# Altium PCB Odin_0.pcbdoc (part 2 of 3)
Units mil, origin at the board's own origin, x right, y up, seen from the top; angles counter-clockwise.
Board outline 3937 x 3937 mil, 4 copper layers (Top Layer, mSIG, mPWR, Bottom Layer), stack 62.3 mil thick; 149 components, 218 nets, 830 pads, 480 vias.
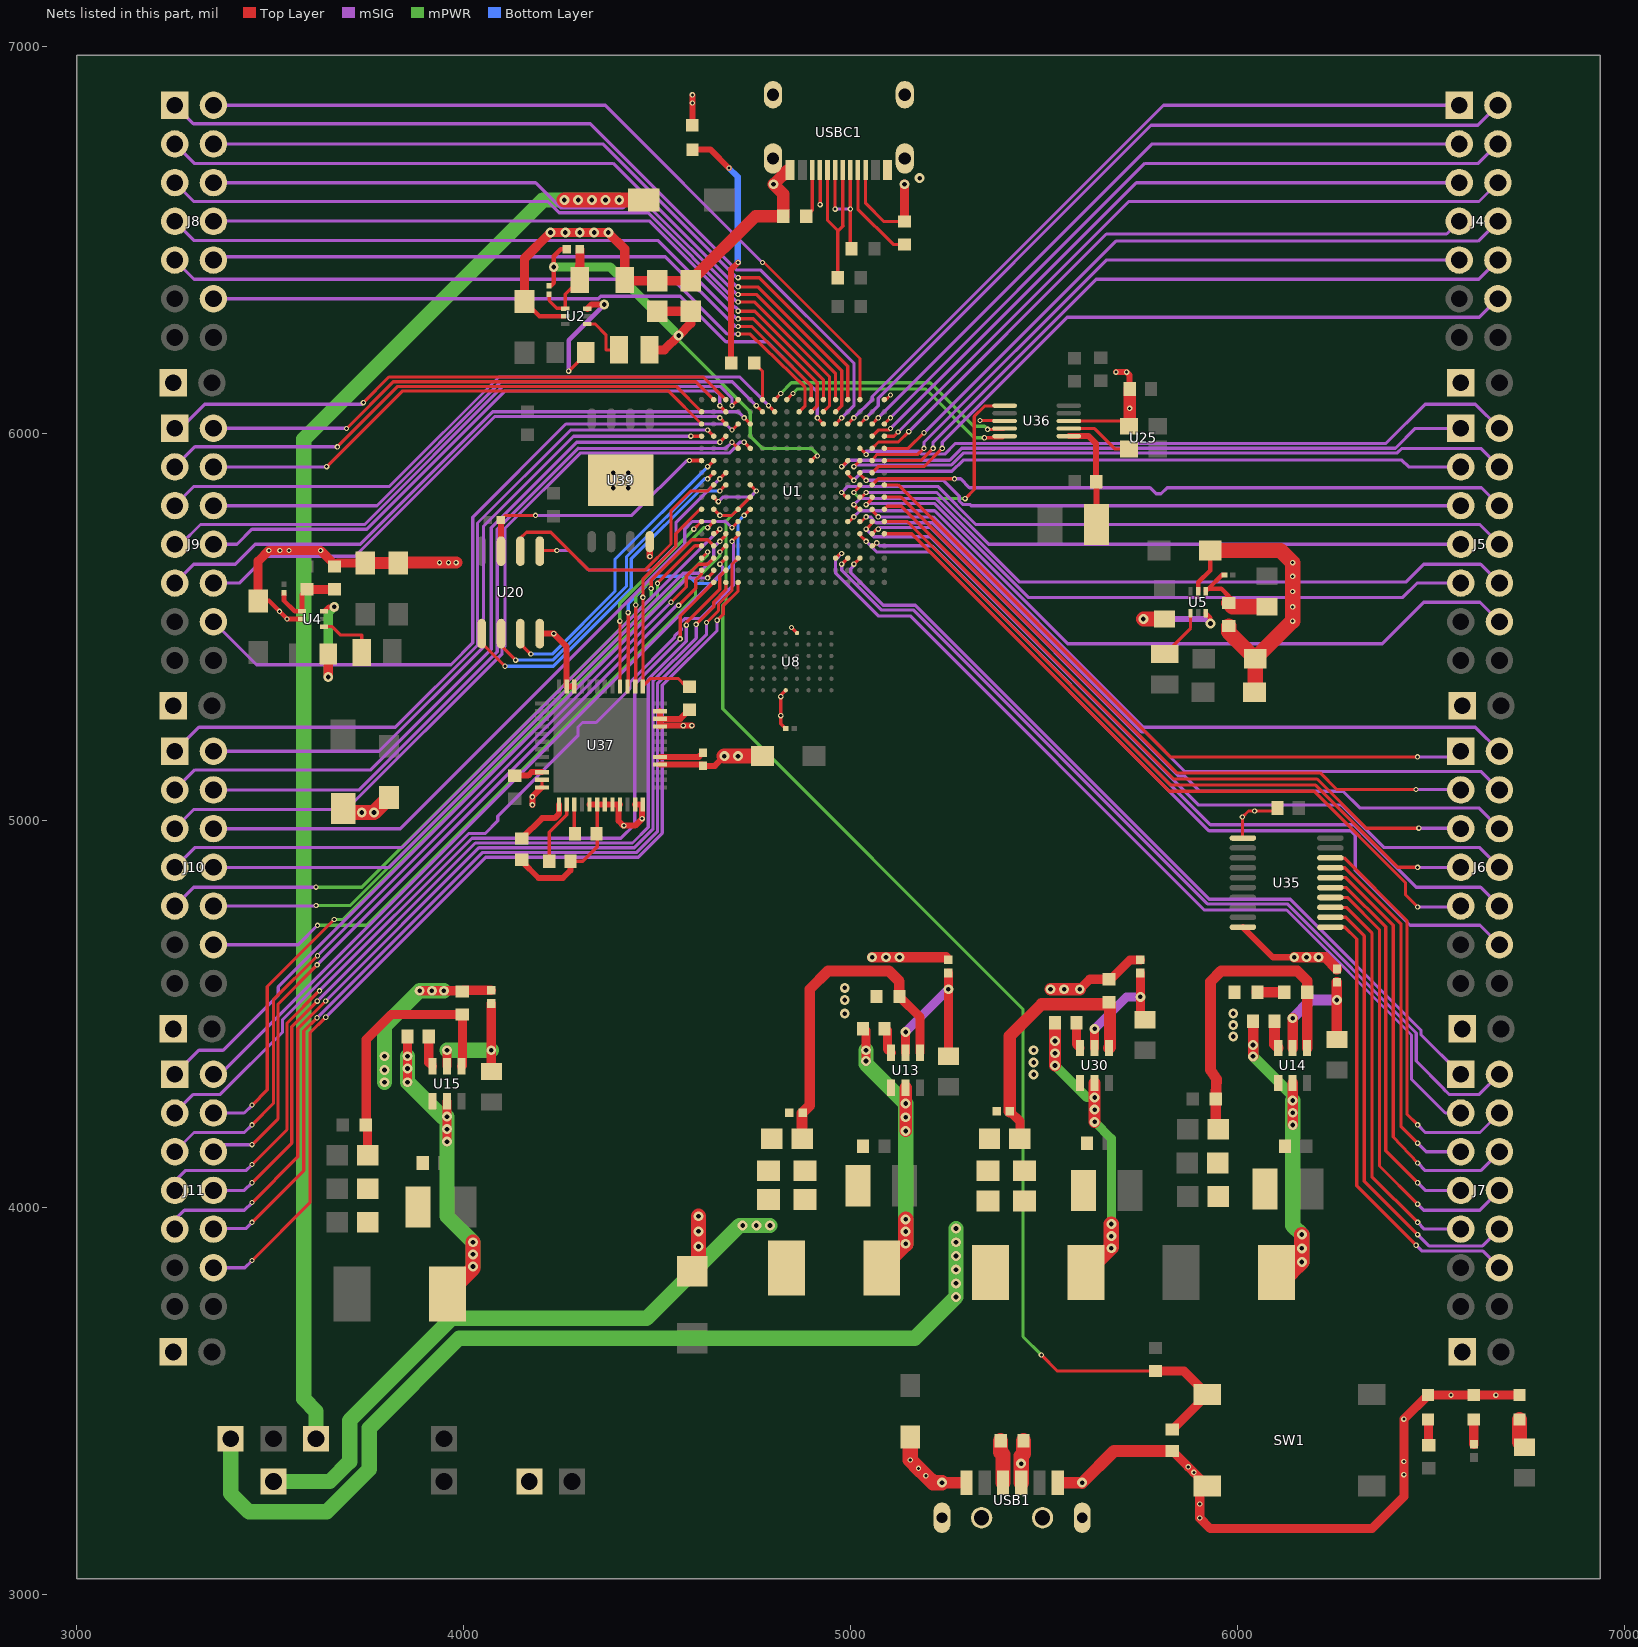
[diagram p4: the nets of this part, all layers, seen from the top]

## Via types
v1: diameter 13.8, hole 7.9, Top Layer to Bottom Layer, 291 vias
v2: diameter 25.6, hole 12.2, Top Layer to Bottom Layer, 176 vias
v3: diameter 24, hole 12, Top Layer to Bottom Layer, 13 vias

## Nets (pads, with @x,y where several pads share a name; then routed paths per layer and width w, separated by ;. In a path a pad name is that pad's centre, name@x,y a point inside that pad or via, vN(x,y) a via of type N, cw(c..) or ccw(c..) an arc to the next point about the centre after c; other vN are vias at no path point)
9VTO5V: C44.1 C45.1 C63.1 L8.1 P10.1 R47.1 | length 2504.7
  mPWR w39.4: P10.1@3397.6,3403 3397.6,3261.3 3444.9,3214 3645.6,3214 3755.9,3324.3 3755.9,3430.6 3988.1,3662.8 5165.4,3662.8 5271.7,3769 v2(5271.7,3804.5) v2(5271.7,3839.9) 5271.6,3875.4 5271.6,3910.8 v2(5271.6,3946.2)
  other v2: 5271.7,3769.1 5271.7,3875.4 5271.7,3910.8
24VTO5V: C25.1 C26.1 C27.1 L5.1 P4.1 R14.1 | length 1619.5
  mPWR w39.4: P4.1@3507.9,3292.7 3653.5,3292.7 3705,3343.8 3705,3449.8 3968.5,3714 4471.7,3714 4712.2,3954.2 v2(4755.9,3954.2) v2(4791.3,3954.2)
  other v2: 4720.5,3954.2
$2N3: C10.1 R1.1 R2.2 U2.1 | length 236.1
  Top Layer w8.3: C10.1@4220.5,6360.7 4220.5,6343.9 4240.2,6324.2 4260.8,6324.2 U2.1@4262.2,6322.8 4262.2,6360.4 R2.2@4299.4,6397.6
  Top Layer w23.6: R2.2@4299.4,6397.6 R1.1@4299.8,6476.3
$2N6: L1.1 U2.4 | length 132.7
  Top Layer w8.3: U2.4@4319.1,6283.4 4339.9,6283.4 4367.2,6256.1 4367.2,6216.5 L1.1@4400.9,6216.5
$2N15: C58.1 R40.2 R110.1 U5.1 | length 250.2
  Top Layer w11.8: U5.1@5917.3,5592.8 5924.3,5599.8 ; C58.1@5965.6,5635.3 5959.7,5635.3 5924.3,5599.8 ; R40.2@5976.4,5562.5 5976.4,5580.1 5956.7,5599.8 5924.3,5599.8
  Top Layer w39.4: R40.2@5976.4,5562.5 5986.3,5552.6 R110.1@6078.7,5552.6
$2N16: L12.1 U5.4 | length 133.1
  Top Layer w8.3: L12.1@5811,5430.5 5877.9,5497.5 U5.4@5877.9,5535.9
$2N19: R7.2 U2.6 | length 325.5
  Top Layer w9.8: v1(4270.9,6161.4) 4315,6205.4 R7.2@4315,6210.1
  Top Layer w15.7: U2.6@4319.1,6322.8 4329.8,6333.5 v2(4362.9,6333.5)
  mSIG w11.8: v1(4270.9,6161.4) 4270.9,6241.6 v2(4362.9,6333.5)
$2N21: R43.2 U5.6 | length 264.7
  Top Layer w11.8: U5.6@5917.3,5535.9 5929.1,5524.1 v2(5929.1,5509.3)
  Top Layer w39.4: v2(5755.9,5521.1) R43.2@5811,5521.1
  mSIG w15.7: v2(5755.9,5521.1) 5917.3,5521.1 v2(5929.1,5509.3)
$2N28: C12.1 R5.1 R6.2 U4.1 | length 211.5
  Top Layer w11.8: C12.1@3535.4,5589 3535.4,5568.3 3563,5540.8 U4.1@3581.8,5540.8 3581.8,5585 R5.1@3594.5,5597.7
  Top Layer w23.6: R5.1@3594.5,5597.7 R6.2@3665.4,5597.7
$2N29: R42.2 U4.6 | length 278.2
  Top Layer w11.8: U4.6@3638.7,5540.8 3650.5,5552.6 v2@3665.4,5552.6
  Top Layer w23.6: v2(3649.6,5371.5) R42.2@3649.6,5430.5
  mPWR w23.6: v2(3649.6,5371.5) 3649.6,5536.8 v2@3665.4,5552.6
  other v2: 3665.3,5552.6
$2N31: L3.1 U4.4 | length 151.9
  Top Layer w8.3: U4.4@3638.7,5501.4 3659.5,5501.4 3680.9,5480 3736.2,5480 L3.1@3736.2,5434.5
$4N4: R11.2 USBC1.A6 USBC1.B6 | length 453
  Top Layer w8.3: USBC1.B6@4939.7,6681 4939.7,6551.1 4967.1,6523.6 ; R11.2@4966.4,6403 4966.4,6522.9 4980.3,6536.8 4979,6538.1 USBC1.A6@4979,6681
$4N5: R8.1 USBC1.B5 | length 125.6
  Top Layer w8.3: R8.1@4884.7,6561.9 4900.3,6577.5 USBC1.B5@4900.3,6681
$4N6: R9.1 USBC1.A5 | length 259.1
  Top Layer w8.3: USBC1.A5@5018.4,6681 5018.4,6579.6 5109.1,6488.9 R9.1@5138.5,6488.9
$4N16: R23.2 USBC1.A7 USBC1.B7 | length 344.7
  Top Layer w8.3: v1(4959.4,6580.1) USBC1.A7@4959.4,6681 ; USBC1.B7@4998.7,6681 v1(4998.7,6580.4) 4998.7,6480.9 R23.2@5001.8,6477.8
  mSIG w8.3: v1@4959.4,6580.2 v1(4998.7,6580.4)
$4N1335: R98.2 USB1.A5 | length 110.7
  Top Layer w39.4: R98.2@5387,3397.6 5387,3368.2 5393,3362.2 USB1.A5@5393,3289.4
$4N1352: LED3.2 R34.1 | length 64.5
  Top Layer w23.6: LED3.2@6609.7,3452.8 6609.7,3389.1 R34.1@6610.2,3388.5
$4N3061: LED4.2 R99.1 | length 635.8
  Top Layer w15.7: LED4.2@4590.7,6733.7 4637.8,6733.7 v1(4685,6686.4) ; R99.1@4690.8,6182.5 4690.8,6248.8 4690,6249.6 4690,6410.7 4690.8,6411.5 4690.8,6424.5 v1(4708.7,6442.3)
  Bottom Layer w15.7: v1(4685,6686.4) 4707.7,6663.8 4707.7,6443.3 v1(4708.7,6442.3)
$4N4988: C78.2 U37.38 | length 165.3
  Top Layer w8.3: C78.2@4220.5,4895.1 4220.5,4969.9 4265.7,5015.2 U37.38@4265.7,5041.7
$4N5020: C79.2 U37.37 | length 146.6
  Top Layer w15.7: C79.2@4149.6,4954.2 4202.2,5006.7 4234.8,5006.7 4246.1,5018 U37.37@4246.1,5041.7
$4N5158: C80.2 U37.39 | length 71.1
  Top Layer w8.3: C80.2@4281,4972.4 4285.4,4976.8 U37.39@4285.4,5041.7
$4N5244: R102.2 U37.5 | length 115.7
  Top Layer w15.7: U37.5@4507,5164.8 4607,5164.8 R102.2@4618.1,5175.9
$4N8187: LED2.2 R103.1 | length 76.9
  Top Layer w39.4: LED2.2@6727.8,3452.8 6727.8,3394 R103.1@6740.6,3381.2
$4N9698: R107.1 U37.34 | length 74.4
  Top Layer w15.7: R107.1@4131.4,5116.2 4166,5116.2 4175.6,5125.8 4201.3,5125.8 U37.34@4201.7,5125.4
$4N11340: LED1.2 R109.1 | length 67.6
  Top Layer w23.6: LED1.2@6491.6,3452.8 6492.6,3451.8 R109.1@6492.6,3385.6
$4N19894: D14.2 P3.1 | length 3871.7
  Top Layer w39.4: v2(4259.8,6603.8) v2(4295.3,6603.8) v2(4330.7,6603.8) v2(4366.1,6603.8) v2(4401.6,6603.8) D14.2@4464.4,6603.8
  mPWR w39.4: P3.1@3618.1,3403 3618.1,3473.9 3586.6,3505.4 3586.6,5986.3 4204.1,6603.8 v2(4259.8,6603.8) v2(4295.3,6603.8) v2(4330.7,6603.8) v2(4366.1,6603.8) v2(4401.6,6603.8)
$5N10: U25.3 U36.2 | length 177.1
  Top Layer w8.3: U36.2@5563.4,6013.2 5629.9,6013.2 5683.1,5960.1 U25.3@5718.5,5960.1
$5N966: C75.1 C76.1 U36.1 | length 287.5
  Top Layer w15.7: U36.1@5563.4,5993.5 5614.2,5993.5 5633.9,5973.8 C75.1@5633.9,5875.4 5634.5,5874.7 C76.1@5634.5,5765.2
$6N1: R13.1 R15.2 U13.5 | length 425
  Top Layer w23.6: U13.5@5141.7,4400.2 v2(5141.7,4454.1) ; R13.1@5252,4391.1 v2(5252,4564.3) R15.2@5252,4606.3
  mSIG w23.6: v2(5141.7,4454.1) v2(5252,4564.3)
$6N4: C27.2 R14.2 R105.2 U13.4 | length 863.1
  Top Layer w23.6: R105.2@5125.5,4545.8 5179.1,4492.2 U13.4@5179.1,4400.2
  Top Layer w27.6: C27.2@4874,4178.5 4874,4244.1 R14.2@4875.3,4245.4 4893.7,4263.8 4893.7,4564.3 4941,4611.6 5098.4,4611.6 5125.5,4584.6 R105.2@5125.5,4545.8
$6N8: C32.1 L5.2 U13.2 | length 883.8
  Top Layer w23.6: v2(5039.4,4379.3) v2(5039.4,4406.7) C32.1@5039.4,4458
  Top Layer w31.5: v2(5141.7,4198.3) v2(5141.7,4233.7) v2(5141.7,4269.1) U13.2@5141.7,4309.7
  Top Layer w39.4: L5.2@5079.9,3843.9 5141.7,3905.7 v2(5141.7,3906.9) v2(5141.7,3938.4) v2(5141.7,3969.9)
  mPWR w39.4: v2(5039.4,4406.7) v2(5039.4,4379.3) 5039.4,4371.5 v2(5141.7,4269.1) v2(5141.7,4233.7) v2(5141.7,4198.3) v2(5141.7,3969.9) v2(5141.7,3938.4) v2(5141.7,3906.9)
$6N9: C18.1 L6.2 U14.2 | length 991.4
  Top Layer w27.6: v2(6039.4,4391.1) v2(6039.4,4420.2) C18.1@6039.4,4481.6 ; v2@6141.7,4245.3 v2(6141.7,4276.9) U14.2@6141.7,4322.2 ; v2(6141.8,4213.9) v2(6141.8,4245.2)
  Top Layer w39.4: L6.2@6099.5,3832.1 6137.8,3832.1 v2(6165.4,3859.6) v2(6165.4,3895) v2(6165.4,3930.5)
  mPWR w27.6: v2(6039.4,4420.2) v2(6039.4,4391.1) 6141.8,4288.7 v2(6141.8,4245.2)
  mPWR w39.4: v2(6141.7,4276.9) 6141.7,4245.2 6141.7,4213.9 6141.7,3954.1 v2(6165.4,3930.5) v2(6165.4,3895) v2(6165.4,3859.6)
$6N11: C28.2 R16.1 U14.4 U16.2 | length 834.5
  Top Layer w27.6: R16.1@5943,4280.9 5943,4207.9 C28.2@5948.8,4202.1 ; R16.1@5943.1,4280.8 5944.9,4332.1 5929.2,4355.6 5929.2,4584 5956.7,4611.5 6153.6,4611.5 6179.3,4585.8 U16.2@6179.3,4556.4 ; U14.4@6179.1,4412.7 U16.2@6179.3,4556.5
$6N12: R20.2 R22.1 U14.5 | length 358.9
  Top Layer w27.6: U14.5@6141.7,4412.7 v2(6141.7,4489.5) ; R22.1@6255.9,4434.4 v2(6255.9,4536.8) R20.2@6255.9,4582.7
  mSIG w27.6: v2(6141.7,4489.5) 6189,4536.8 v2(6255.9,4536.8)
$6N19: C38.1 L7.2 U15.2 | length 1004.8
  Top Layer w23.6: v2(3854.3,4324.2) v2(3854.3,4359.7) v2(3854.3,4391.2) C38.1@3854.3,4442.3 ; v2(3956.7,4170.7) v2(3956.7,4203) v2(3956.7,4235.2) U15.2@3956.7,4275.1
  Top Layer w39.4: L7.2@3957.8,3777 4023.6,3842.8 v2(4023.6,3847.9) v2(4023.6,3879.4) v2(4023.6,3910.8)
  mPWR w39.4: v2(3854.3,4391.2) v2(3854.3,4359.7) v2(3854.3,4324.2) 3943.4,4235.2 v2(3956.7,4235.2) v2(3956.7,4203) v2(3956.7,4170.7) 3956.7,3977.8 v2(4023.6,3910.8) v2(4023.6,3879.4) v2(4023.6,3847.9)
$6N21: C34.2 U15.4 U17.2 U18.1 | length 711.6
  Top Layer w23.6: C34.2@3751.2,4135.3 3751.2,4209 U18.1@3746.2,4214 3748,4215.8 3748,4434.5 3812.9,4499.3 U17.2@3996.1,4499.3 3996.1,4367.5 U15.4@3994.1,4365.5
$6N22: R25.2 R27.1 U15.5 | length 331.5
  Top Layer w23.6: U15.5@3956.7,4365.5 v2(3956.7,4406.9) ; R27.1@4070.9,4351.8 v2(4070.9,4406.9) R25.2@4070.9,4527.7
  mPWR w39.4: v2(3956.7,4406.9) v2(4070.9,4406.9)
$6N32: C37.1 L8.2 U30.2 | length 970.9
  Top Layer w31.5: v2(5527.6,4367.5) v2(5527.6,4399) v2(5527.6,4430.5) C37.1@5527.6,4477.7 ; v2(5629.9,4221.9) v2(5629.9,4253.3) v2(5629.9,4284.8) U30.2@5629.9,4322.2
  Top Layer w39.4: L8.2@5607.4,3832.1 5673.2,3897.9 v2(5673.2,3926.5) v2(5673.2,3958)
  mPWR w23.6: v2(5527.6,4430.5) v2(5527.6,4399) v2(5527.6,4367.5) 5610.2,4284.8 v2(5629.9,4284.8) v2(5629.9,4253.3) v2(5629.9,4221.9) 5673.2,4178.6 v2(5673.2,3958) v2(5673.2,3926.5) v2(5673.2,3895.1)
$6N33: C44.2 R47.2 R104.2 U30.4 | length 682.4
  Top Layer w23.6: R47.2@5410.8,4249.4 5437,4223.1 C44.2@5437,4178.5
  Top Layer w31.5: R47.2@5410.8,4249.4 5410.8,4443.6 5493,4525.8 5669.3,4525.8 5669.3,4414.7 U30.4@5667.3,4412.7
$6N34: R46.2 R48.1 U30.5 | length 322.5
  Top Layer w23.6: U30.5@5629.9,4412.7 v2(5629.9,4462) ; R48.1@5748,4485.6 v2(5748,4544.7) R46.2@5748,4606.4
  mSIG w23.6: v2(5629.9,4462) 5712.6,4544.7 v2(5748,4544.7)
$6N1189: C32.2 U13.6 | length 61.8
  Top Layer w23.6: C32.2@5094.5,4458 5094.5,4410.1 U13.6@5104.3,4400.2
$6N1190: C18.2 U14.6 | length 73
  Top Layer w27.6: C18.2@6094.5,4481.7 6094.5,4422.6 U14.6@6104.3,4412.7
$6N1191: C38.2 U15.6 | length 80.9
  Top Layer w23.6: C38.2@3909.4,4442.3 3909.4,4375.4 U15.6@3919.3,4365.5
$6N1193: C37.2 U30.6 | length 69
  Top Layer w23.6: C37.2@5582.7,4477.7 5582.7,4422.6 U30.6@5592.5,4412.7
$6N3931: R108.2 U16.1 | length 70.6
  Top Layer w27.6: R108.2@6049.4,4556.5 U16.1@6120,4556.5
CLK1_OUT: U1.J1 U36.10 | length 627.9
  Top Layer w8.3: U1.J1@4834.6,6088 v1(4850.4,6103.8) ; v1(5344.8,5989.5) 5393.2,5989.5 U36.10@5397.2,5993.5
  mPWR w8.3: v1(4850.4,6103.8) 4862.2,6115.6 5192.9,6115.6 5319,5989.5 v1(5344.8,5989.5)
CLK2_OUT: U1.K1 U36.9 | length 662.7
  Top Layer w8.3: U1.K1@4803.2,6088 v1(4818.9,6103.7) ; v1(5353.6,6011) 5395.1,6011 U36.9@5397.2,6013.2
  mPWR w8.3: v1@4818.9,6103.8 4846.5,6131.3 5204.8,6131.3 5317.1,6018.9 5345.7,6018.9 v1(5353.6,6011)
CLK3_OUT: U1.C8 U36.6 | length 632.2
  Top Layer w8.3: v1(5007.9,5847.9) 5023.6,5863.6 U1.C8@5023.6,5867.5 ; v1(5295.2,5832.1) 5318.9,5855.7 5318.9,6044.7 5345.7,6071.5 5396.5,6071.5 U36.6@5397.2,6072.3
  mPWR w8.3: v1(5007.9,5847.9) 5023.7,5832.1 v1(5295.2,5832.1)
FPGA_RESET: C74.2 R4.1 SW1.1 U1.M8 U1.R9 | length 3357.3
  Top Layer w8.3: U1.R9@4645.7,5836 v1(4657.5,5824.2) ; U1.M8@4740.2,5867.5 v1(4755.9,5851.8) ; v1(5492.1,3619.5) 5533.5,3578 R4.1@5787.4,3578
  Top Layer w23.6: R4.1@5787.4,3578 5860.4,3578 SW1.1@5921.3,3517.2 ; C74.2@5830.7,3426.6 SW1.1@5921.3,3517.1
  mSIG w8.3: v1(4657.5,5824.2) 4669.3,5836 4740.2,5836 v1(4755.9,5851.8)
  mPWR w8.3: v1(4755.9,5851.8) 4677.2,5773.1 4677.2,5564.4 4669.3,5556.5 4669.3,5288.8 5444.9,4513.2 5444.9,3666.8 v1(5492.1,3619.5)
FRAM_CS#: U1.P8 U20.1 | length 918.9
  Top Layer w8.3: U20.1@4046.2,5483.4 4046.2,5459.1 v1(4106.3,5399) ; v1(4661.4,5851.8) U1.P8@4677.2,5867.5
  Bottom Layer w8.3: v1(4106.3,5399) 4231.3,5399 4432.6,5600.4 4432.6,5676.7 4607.8,5851.8 v1(4661.4,5851.8)
FRAM_HOLD#: R10.2 U1.T6 U20.7 | length 662.7
  Top Layer w8.3: R10.2@4095.8,5777 4107.6,5788.8 v1(4185,5788.8)
  Top Layer w9.8: v1(4582.7,5930.5) U1.T6@4614.2,5930.5
  Top Layer w15.7: R10.2@4095.8,5777 4095.8,5696.8 U20.7@4096.2,5696.4
  mSIG w8.3: v1(4185,5788.8) 4434.1,5788.8 4575.8,5930.5 v1(4582.7,5930.5)
FRAM_MISO: U1.R7 U20.2 | length 841.3
  Top Layer w8.3: U20.2@4096.2,5483.4 4096.2,5452.4 v1(4133.9,5414.8) ; v1(4629.9,5883.3) U1.R7@4645.7,5899
  Bottom Layer w8.3: v1(4133.9,5414.8) 4229.8,5414.8 4420.4,5605.4 4420.4,5681.7 4622,5883.3 v1(4629.9,5883.3)
FRAM_MOSI: U1.P7 U20.5 | length 642
  Top Layer w8.3: U20.5@4196.2,5696.4 4198.1,5698.2 v1(4240.2,5698.2) ; v1(4661.4,5883.3) U1.P7@4677.2,5899
  mSIG w8.3: v1(4240.2,5698.2) 4271.7,5698.2 4322,5647.9 4486.5,5647.9 4547.9,5709.3 4547.9,5769.8 v1(4661.4,5883.3)
FRAM_SCK: U1.R8 U20.6 | length 720.9
  Top Layer w8.3: U20.6@4146.2,5696.4 4146.2,5729.7 4162,5745.5 4224.4,5745.5 4322,5647.9 4468.4,5647.9 4535.4,5714.9 4535.4,5800.6 4586.6,5851.8 4629.9,5851.8 U1.R8@4645.7,5867.5
FRAM_WP#: U1.R6 U20.3 | length 792.1
  Top Layer w8.3: U20.3@4146.2,5483.4 4146.2,5457.5 v1(4173.2,5430.5) ; v1(4629.9,5914.8) U1.R6@4645.7,5930.5
  Bottom Layer w8.3: v1(4173.2,5430.5) 4228.3,5430.5 4390.6,5592.8 4390.6,5675.4 v1(4629.9,5914.8)
GND: C1.2 C3.2 C4.1 C6.2 C8.2 C9.2 C13.2 C14.1 C15.1 C17.2 C22.1 C25.2 C26.2 C33.1 C39.1 C40.1 C41.1 C42.1 C43.1 C45.2 C46.1 C47.1 C48.1 C49.1 C59.2 C60.2 C61.2 C62.1 C63.2 C64.1 C73.1 C74.1 C78.1 C79.1 C80.1 D5.2 D6.2 H5.1 H6.1 H7.1 H8.1 H9.1 H10.1 H11.1 H12.1 LED1.1 LED2.1 LED3.1 LED4.1 P6.1 R2.1 R6.1 R8.2 R9.2 R15.1 R20.1 R21.1 R25.1 R40.1 R46.1 R98.1 R102.1 R104.1 R105.1 R108.1 SW1.3 U1.A1 U1.M9 U1.N10 U1.R10 U2.2 U4.2 U5.2 U8.D1 U8.E6 U13.1 U14.1 U15.1 U17.1 U20.4 U25.2 U30.1 U35.1 U35.10 U36.3 U36.8 U37.4 U37.9 U37.10 U37.11 U37.22 U37.23 U37.35 U37.36 U37.41 U37.42 U37.43 U37.44 U37.45 U37.47 U37.48 U39.4 U39.9 USB1.7 USB1.8 USB1.9 USB1.10 USB1.A12 USB1.B5 USB1.B12 USBC1.0 USBC1.1 USBC1.2 USBC1.3 USBC1.A1 USBC1.A8 USBC1.A12 USBC1.B1 USBC1.B8 USBC1.B12 | length 9138.7
  Top Layer w8.3: U37.36@4201.7,5086 U37.35@4201.7,5105.7 ; C78.1@4275.6,4895.1 4307.1,4895.1 4344.5,4932.5 U37.42@4344.5,5041.7 ; U1.R10@4645.7,5804.5 v1(4661.4,5788.8) 4692.9,5788.8 U1.N10@4708.7,5804.5 U1.M9@4740.2,5836 ; C14.1@4831.7,5237.6 4818.9,5250.5 v1(4818.9,5271.4) v1(4818.9,5320.3) 4818.9,5324.2 U8.D1@4831.7,5337 ; v1(4846.5,5499.3) U8.E6@4861.2,5484.6 ; USBC1.A8@4920,6681 4920.8,6680.2 v1(4920.8,6591.9) ; USBC1.B8@5038.1,6681 5038.1,6595.3 5085.2,6548.2 R9.2@5138.5,6548.2 ; U1.A1@5086.6,6088 5090.6,6088 v1(5102.4,6099.8) ; v1(5333.8,6033.9) 5396.3,6033.9 U36.8@5397.2,6032.9 ; U36.3@5563.4,6032.9 5704.7,6032.9 U25.2@5718.5,6019.1 ; U35.1@6012.9,4955.1 6011.8,4956.2 v1(6011.8,5009.3) 6027.6,5025 v1(6043.3,5025) C73.1@6102.4,5025
  Top Layer w11.8: C3.2@3468.5,5567.8 3496.6,5567.8 v1(3523.6,5540.8) v1(3543.3,5521.1) U4.2@3581.8,5521.1 ; C1.2@4156.8,6341.9 4195.6,6303.1 U2.2@4262.2,6303.1 ; U5.2@5897.6,5592.8 5897.6,5615.6 5928.6,5646.5 C61.2@5928.6,5698.2
  Top Layer w15.7: C79.1@4149.6,4899 4149.6,4895.1 4192.9,4851.8 4255.9,4851.8 4275.6,4871.5 C78.1@4275.6,4895.1 ; v1(4177.2,5040.8) v1(4177.2,5061.5) U37.36@4201.7,5086 ; U20.4@4196.2,5483.4 v1(4232.3,5483.4) 4265.7,5449.9 U37.23@4265.7,5347 U37.22@4285.4,5347 ; U37.41@4324.8,5041.7 U37.42@4344.5,5041.7 U37.43@4364.2,5041.7 U37.44@4383.9,5041.7 U37.45@4403.5,5041.7 4399.6,5037.7 4399.6,4999.4 4412,4987.1 v1(4413.4,4987.1) 4442.4,4987.1 v1(4460.6,5005.3) U37.48@4460.6,5041.7 ; U37.47@4442.9,5041.7 U37.48@4460.6,5041.7 ; U37.48@4460.6,5043.1 U37.48@4460.6,5041.7 ; v1(4480.5,5682.5) U39.4@4480.5,5720.8 ; U37.4@4507,5145.1 4614.8,5145.1 R102.1@4618.1,5141.8 4648.3,5141.8 v2(4673.2,5166.8) ; U37.9@4507,5243.5 U37.10@4507,5263.2 ; U37.11@4507,5282.9 U37.10@4507,5263.2 ; U37.9@4509.5,5245.5 v1(4566.9,5245.5) v1(4589.1,5245.5) ; R21.1@4582.7,5286.7 4559.2,5263.2 U37.10@4507,5263.2 ; LED4.1@4590.4,6796.7 v1(4590.4,6854.3) v1(4590.4,6875.4) ; v1(5685,6158.9) v1(5712.6,6158.9) ; v1@5712.2,6158.5 v1(5712.6,6158.9) ; C15.1@5720.5,6115.6 5720.5,6151 v1(5712.6,6158.9) ; U35.10@6012.9,4724.8 6090.7,4647 v2(6145.7,4647)
  Top Layer w23.6: C3.2@3468.5,5567.8 3468.5,5670.7 v1(3496.1,5698.2) v1(3524.7,5698.2) v1(3548.3,5698.2) v1(3629.9,5698.2) 3665.4,5662.8 R6.1@3665.4,5657 3674.4,5666 C8.2@3745.4,5666 ; v2(3885.8,4560.5) 3917.5,4560.5 3948.5,4560.5 3994.2,4560.5 U17.1@3996.1,4558.6 3999.2,4561.8 R25.1@4070.9,4561.8 ; C1.2@4156.8,6341.9 4156.8,6452.7 v2(4223.7,6519.6) v2(4262.3,6519.6) v2(4299.5,6519.6) v2(4336.8,6519.6) v2(4373.3,6519.6) 4415.8,6477.2 R2.1@4415.8,6397.6 4418.3,6395.1 C62.1@4500,6395.1 C4.1@4586.6,6395.1 ; R9.2@5138.5,6548.2 v2(5138.5,6644.5) ; v2(5591.4,4564.3) 5617.3,4590.2 R104.1@5666.7,4590.2 5671.6,4590.2 5721.8,4640.4 R46.1@5748,4640.4 ; C74.1@5830.7,3371.5 5871.7,3330.4 5886.2,3315.9 SW1.3@5921.3,3280.9 5901.6,3261.2 v1(5901.6,3234.2) v1(5901.6,3198.2) 5929.1,3170.7 6346.4,3170.7 6429.1,3253.4 v1(6429.1,3310.2) v1(6429.1,3344.2) 6429.1,3450.2 v1(6429.1,3453.6) LED1.1@6491.3,3515.7 v1(6550.6,3515.7) LED3.1@6609.4,3515.7 v1(6666.6,3515.7) LED2.1@6727.5,3515.7
  Top Layer w27.6: v2(5055.1,4647) v2(5090.6,4647) v2(5126,4647) R15.1@5245.4,4647 ; v2(6145.7,4647) v2(6208.7,4647) 6225.7,4647 R20.1@6255.9,4616.8
  Top Layer w29.5: v2(5235.5,3289.4) USB1.B12@5298.5,3289.4 ; USB1.A12@5534.7,3289.4 v2(5597.7,3289.4)
  Top Layer w31.5: C8.2@3745.4,5666 C9.2@3830.7,5666.2 3831.3,5666.8 v1(3937,5666.8) ; v1(3980.3,5666.8) v1(3960.6,5666.8) ; C4.1@4586.6,6395.1 4753.4,6561.9 R8.2@4825.4,6561.9 4825.4,6619.1 v2(4799.9,6644.5) 4800.9,6644.5 USBC1.A12@4837.3,6681 ; v2(5515.8,4564.3) v2(5551.2,4564.3) v2(5591.4,4564.3) ; v2(5597.7,3289.4) 5679.8,3371.5 C74.1@5830.7,3371.5 ; U25.2@5718.5,6019.1 5720.5,6021.1 v1(5720.5,6065.3) C15.1@5720.5,6115.6 ; v1(3937,5666.8) v1(3960.6,5666.8) ; v1(3937,5666.8) v1(3960.6,5666.8)
  Top Layer w39.4: D5.2@3688.6,5031.3 3698.9,5021.1 v2(3736.2,5021.1) v2(3767.7,5021.1) 3767.9,5021.1 C17.2@3806.4,5059.6 ; D6.2@4590.5,3836.1 4606.3,3851.9 v2(4606.3,3899.8) v2(4606.3,3938.8) v2(4606.3,3977.8) ; v2(4673.2,5166.8) v2(4708.7,5166.8) C13.2@4772.2,5166.8 ; C6.2@5153.5,3411.4 v1(5153.5,3347.9) v1(5174.8,3326.6) v1(5194,3307.4) 5212,3289.4 v2(5235.5,3289.4) ; USB1.B5@5440.2,3289.4 v2(5440.2,3338.6) 5440.2,3358.3 5446.3,3364.3 R98.1@5446.3,3397.6 ; C61.2@5928.6,5698.2 6110.2,5698.2 v1(6141.7,5666.7) v1(6141.7,5631.3) v1(6141.7,5592) v1(6141.7,5552.6) v1(6141.7,5515.6) C59.2@6044.8,5418.7 ; R40.1@5976.4,5503.2 5976.4,5487.2 C59.2@6044.8,5418.7 ; C60.2@6042.8,5332.1 6044.8,5334.2 C59.2@6044.8,5418.7
  mPWR w39.4: v2(3795.3,4324.2) v2(3795.3,4355.7) v2(3795.3,4391.2) 3795.3,4469.9 v2(3885.8,4560.5) v2@3948.5,4560.5
  other v1: 5886.3,3316 5871.8,3330.5
  other v2: 5472.4,4343.9 5472.4,4375.4 5472.4,4406.9 5988.2,4442.3 5988.2,4471.7 4984.3,4501.4 5988.2,4501.7 4984.3,4536.7 3917.4,4560.5 3948.4,4560.5 4984.3,4568.1 6177.2,4647 5177.9,6660.3
  other v3: 4385.8,5859.7 4425.2,5859.7 4385.8,5899 4425.2,5899
IO_1: J8.1 U1.E3 | length 2207.8
  Top Layer w8.3: U1.E3@4960.6,6025 v1(4976.4,6040.8)
  mSIG w8.3: J8.1@3253.1,6848.6 3301.2,6800.6 4326.9,6800.6 4704.7,6422.7 4767.7,6422.7 5007.9,6182.5 5007.9,6143.2 5007.9,6072.3 v1(4976.4,6040.8)
IO_2: J8.2 U1.C1 | length 2043.9
  Top Layer w8.3: v1(4771.6,6442.3) 4775.6,6442.3 5023.6,6194.3 U1.C1@5023.6,6091.9
  mSIG w8.3: J8.2@3353.1,6848.6 4365.4,6848.6 v1(4771.6,6442.3)
IO_3: J8.3 U1.E2 | length 2078.8
  Top Layer w8.3: v1@4708.7,6379.3 4759.8,6379.3 4976.4,6162.8 4976.4,6143.1 4976.4,6072.2 U1.E2@4960.6,6056.5
  mSIG w8.3: J8.3@3253.1,6748.6 3303.5,6698.2 4385.8,6698.2 4704.7,6379.3 v1@4708.7,6379.3
  other v1: 4708.7,6379.4
IO_4: J8.4 U1.D1 | length 1963.4
  Top Layer w8.3: v1(4708.7,6403) 4763.8,6403 4992.1,6174.7 4992.1,6143.2 U1.D1@4992.1,6088
  mSIG w8.3: J8.4@3353.1,6748.6 4359,6748.6 4704.8,6403 v1(4708.7,6403)
IO_5: J8.5 U1.F2 | length 1996.7
  Top Layer w8.3: v1(4708.7,6340) 4752,6340 4944.9,6147.1 4944.9,6072.2 U1.F2@4929.1,6056.5
  mSIG w8.3: J8.5@3253.1,6648.6 3302,6599.8 4217.1,6599.8 4246.1,6570.8 4476.2,6570.8 4707,6340 v1(4708.7,6340)
IO_6: J8.6 U1.E1 | length 1893
  Top Layer w8.3: v1(4708.7,6359.7) 4755.9,6359.7 4960.6,6155 U1.E1@4960.6,6088
  mSIG w8.3: J8.6@3353.1,6648.6 4185.5,6648.6 4251.2,6582.9 4410.2,6582.9 4427.1,6599.8 4464.6,6599.8 4704.7,6359.7 v1(4708.7,6359.7)
IO_7: J8.7 U1.G2 | length 1914.5
  Top Layer w8.3: v1(4708.7,6296.7) 4748,6296.7 4913.4,6131.3 4913.4,6072.2 U1.G2@4897.6,6056.5
  mSIG w8.3: J8.7@3253.1,6548.6 3303,6498.8 4502.6,6498.8 4704.7,6296.7 v1(4708.7,6296.7)
IO_8: J8.8 U1.F1 | length 1800.9
  Top Layer w8.3: v1(4708.7,6316.4) 4752,6316.4 4929.1,6139.2 U1.F1@4929.1,6088
  mSIG w8.3: J8.8@3353.1,6548.6 3354.3,6549.8 4479.1,6549.8 4693.7,6335.2 4693.7,6333.8 4702.5,6325.1 4703.9,6325.1 4708.7,6320.3 v1(4708.7,6316.4)
IO_9: J8.9 U1.H2 | length 1833.5
  Top Layer w8.3: v1(4708.7,6257.3) 4740.2,6257.3 4881.9,6119.5 4881.9,6072.3 U1.H2@4866.2,6056.5
  mSIG w8.3: J8.9@3253.1,6448.6 3302.8,6399 4539.5,6399 4681.1,6257.3 v1(4708.7,6257.3)
IO_10: J8.10 U1.G1 | length 1721.5
  Top Layer w8.3: v1(4708.7,6277) 4744.1,6277 4897.6,6123.4 U1.G1@4897.6,6088
  mSIG w8.3: J8.10@3353.1,6448.6 3361.4,6456.9 4520.9,6456.9 4700.8,6277 v1(4708.7,6277)
IO_12: J8.12 U1.F3 | length 1754.8
  Top Layer w8.3: v1(4913.4,6040.8) U1.F3@4929.1,6025
  mSIG w8.3: J8.12@3353.1,6348.6 4347.3,6348.6 4353.9,6355.3 4559.5,6355.3 4677.2,6237.6 4783.5,6237.6 4913.4,6107.7 v1(4913.4,6040.8)
IO_17: J9.1 U1.P1 | length 1503.1
  Top Layer w8.3: v1(3740.2,6080.1) 3806.5,6146.4 4618.7,6146.4 U1.P1@4677.2,6088
  mSIG w8.3: J9.1@3253.1,6014 3268.5,6014 3330.7,6076.2 3736.2,6076.2 v1(3740.2,6080.1)
IO_18: J9.2 U1.R1 | length 1362.3
  Top Layer w8.3: v1(3696.8,6013.2) 3817.9,6134.3 4599.4,6134.3 U1.R1@4645.7,6088
  mSIG w8.3: J9.2@3353.1,6014 3696.1,6014 v1(3696.8,6013.2)
IO_19: J9.3 U1.T2 | length 1474.4
  Top Layer w8.3: v1(3673.2,5966) 3829.4,6122.1 4548.6,6122.1 U1.T2@4614.2,6056.5
  mSIG w8.3: J9.3@3253.1,5914 3305.1,5966 v1(3673.2,5966)
IO_20: J9.4 U1.T3 | length 1377.4
  Top Layer w8.3: v1(3645.7,5914.8) 3840.9,6109.9 4529.2,6109.9 U1.T3@4614.2,6025
  mSIG w8.3: J9.4@3353.1,5914 3644.9,5914 v1(3645.7,5914.8)
IO_21: J9.5 U1.K2 | length 1725
  Top Layer w8.3: v1(4787.4,6072.3) U1.K2@4803.2,6056.5
  mSIG w8.3: J9.5@3253.1,5814 3302.8,5863.6 3808,5863.6 4090.8,6146.4 4713.2,6146.4 v1(4787.4,6072.3)
IO_22: J9.6 U1.L2 | length 1583.5
  Top Layer w8.3: v1(4755.9,6072.3) U1.L2@4771.7,6056.5
  mSIG w8.3: J9.6@3353.1,5814 3775.6,5814 4095.9,6134.3 4693.9,6134.3 v1(4755.9,6072.3)
IO_23: J9.7 U1.N1 | length 1663.3
  Top Layer w8.3: v1(4692.9,6072.3) U1.N1@4708.7,6088
  mSIG w8.3: J9.7@3253.1,5714 3268.4,5714 3319.6,5765.2 3744,5765.2 4100.9,6122.1 4662.8,6122.1 4692.9,6091.9 v1(4692.9,6072.3)
IO_24: J9.8 U1.P2 | length 1526.3
  Top Layer w8.3: v1(4661.4,6072.3) U1.P2@4677.2,6056.5
  mSIG w8.3: J9.8@3353.1,5714 3353.5,5714.4 3413.8,5714.4 3452.5,5753.1 3749.1,5753.1 4106,6109.9 4651.3,6109.9 4661.4,6099.8 v1(4661.4,6072.3)
IO_25: J9.9 U1.M3 | length 1683.4
  Top Layer w8.3: v1(4724.4,6040.8) U1.M3@4740.2,6025
  mSIG w8.3: J9.9@3253.1,5614 3302,5662.8 3409.4,5662.8 3460.6,5714 3732.3,5714 4074.8,6056.5 4708.7,6056.5 v1(4724.4,6040.8)
IO_26: J9.10 U1.P3 | length 1510.3
  Top Layer w8.3: v1(4661.4,6040.8) U1.P3@4677.2,6025
  mSIG w8.3: J9.10@3353.1,5614 3353.5,5614.4 3420.9,5614.4 3489.9,5683.3 3718.9,5683.3 4079.8,6044.3 4657.9,6044.3 v1(4661.4,6040.8)
IO_28: J9.12 U1.N3 | length 1862.6
  Top Layer w8.3: v1(4692.9,6009.3) U1.N3@4708.7,6025
  mSIG w8.3: J9.12@3353.1,5514 3464.2,5403 3966.9,5403 4023.1,5459.3 4023.1,5784.4 4263.8,6025 4677.2,6025 v1(4692.9,6009.3)
IO_33: J10.1 U1.R4 | length 1927.5
  Top Layer w8.3: v1(4629.9,6009.3) U1.R4@4645.7,5993.5
  mSIG w8.3: J10.1@3253.1,5179.4 3315.4,5241.6 3822.9,5241.6 4035.4,5453.8 4035.4,5769.1 4275.6,6009.3 v1(4629.9,6009.3)
IO_34: J10.2 U1.T4 | length 1780.8
  Top Layer w8.3: v1(4586.6,5993.5) U1.T4@4614.2,5993.5
  mSIG w8.3: J10.2@3353.1,5179.4 3780.8,5179.4 4051.2,5449.8 4051.2,5761.3 4283.4,5993.5 v1(4586.6,5993.5)
IO_35: J10.3 U1.P4 | length 1987.1
  Top Layer w8.3: v1(4661.4,5977.8) U1.P4@4677.2,5993.5
  mSIG w8.3: J10.3@3253.1,5079.4 3305.1,5131.3 3759.8,5131.3 4070.9,5442.4 4070.9,5757.3 4291.4,5977.8 v1(4661.4,5977.8)
IO_36: J10.4 U1.N5 | length 1920.2
  Top Layer w8.3: v1(4692.9,5977.8) U1.N5@4708.7,5962
  mSIG w8.3: J10.4@3353.1,5079.4 3730,5079.4 4086.6,5436.1 4086.6,5753.4 4295.3,5962.1 4677.2,5962 v1(4692.9,5977.8)
IO_37: J10.5 U1.M5 | length 2094
  Top Layer w8.3: v1(4724.4,5977.8) U1.M5@4740.2,5962
  mSIG w8.3: J10.5@3253.1,4979.4 3302.8,5029 3696.7,5028.9 4098.8,5430.9 4098.8,5442.6 4106.3,5450.2 4106.3,5755.9 4300.3,5949.9 4686.1,5949.9 4707.8,5971.6 4707.8,5973 4712.6,5977.8 v1(4724.4,5977.8)
IO_38: J10.6 U1.N11 | length 1720.4
  Top Layer w8.3: v1(4692.9,5757.3) U1.N11@4708.6,5773
  mSIG w8.3: J10.6@3353.1,4979.4 3836.2,4979.4 4570.9,5714 4570.9,5753.4 4590.5,5773.1 4677.2,5773.1 v1(4692.9,5757.3)
IO_39: J10.7 U1.R12 | length 1791.5
  Top Layer w8.3: U1.R12@4645.7,5741.5 4649.6,5741.5 v1(4661.4,5753.4)
  mSIG w8.3: J10.7@3253.1,4879.4 3304.3,4930.5 3840.4,4930.6 4661.2,5753.4 v1(4661.4,5753.4)
IO_40: J10.8 U1.P12 | length 1699.5
  Top Layer w8.3: v1(4661.4,5721.9) 4677.2,5737.6 U1.P12@4677.2,5741.5
  mSIG w8.3: J10.8@3353.1,4879.4 3806.8,4879.3 4567,5639.5 4606.3,5639.5 4645.7,5678.9 4645.7,5706.1 v1(4661.4,5721.9)
IO_41: J10.9 U1.R13 | length 1817.6
  Top Layer w8.3: v1(4484.2,5599.8) 4484.2,5621.1 4588.9,5725.8 4629.9,5725.8 U1.R13@4645.7,5710.1
  mSIG w8.3: J10.9@3253.1,4779.4 3302,4828.2 v1(3618.1,4828.2)
  mPWR w8.3: v1(3618.1,4828.2) 3736.6,4828.2 4484.2,5575.9 v1(4484.2,5599.8)
IO_42: J10.10 U1.T13 | length 1669.3
  Top Layer w8.3: v1(4500.3,5613.4) 4597,5710.1 U1.T13@4614.2,5710.1
  mSIG w8.3: J10.10@3353.1,4779.4 3616.9,4779.4 v1(3618.5,4780.9)
  mPWR w8.3: v1(3618.5,4780.9) 3706.5,4780.9 4500.3,5574.7 v1(4500.3,5613.4)
IO_44: J10.12 U1.P13 | length 1781.9
  Top Layer w8.3: v1(4661.4,5694.3) U1.P13@4677.2,5710.1
  mSIG w8.3: J10.12@3353.1,4679.4 3571.7,4679.4 v1(3622,4729.7)
  mPWR w8.3: v1(3622,4729.7) 3749.5,4729.7 4598.4,5578.7 4598.4,5620.9 4661.4,5683.9 v1(4661.4,5694.3)
IO_49: J11.1 U1.R15 | length 1946.7
  Top Layer w8.3: v1(4629.9,5627.4) 4645.7,5643.1 U1.R15@4645.7,5647.1
  mSIG w8.3: J11.1@3253.1,4344.7 3315.4,4406.9 3378,4406.9 3520.3,4549.3 3520.3,4570.4 4577.3,5627.4 v1(4629.9,5627.4)
IO_50: J11.2 U1.P14 | length 1898.2
  Top Layer w8.3: v1(4661.4,5662.8) U1.P14@4677.2,5678.6
  mSIG w8.3: J11.2@3353.2,4344.7 3370.9,4344.7 4668.1,5642 4668.1,5656.1 v1(4661.4,5662.8)
IO_51: J11.3 U1.N12 | length 2214.7
  Top Layer w8.3: v1(4692.9,5721.9) 4708.7,5737.6 U1.N12@4708.7,5741.5
  mSIG w8.3: J11.3@3253.1,4244.7 3301.2,4292.8 3371,4292.8 3531.5,4453.2 3531.5,4486 4012.1,4966.7 4054.8,4966.7 4087.4,4999.3 4087.4,5011.5 4294.9,5219 4294.9,5242 4306.7,5253.7 4341.8,5253.7 4429.4,5341.3 4429.4,5357.5 4544.1,5472.2 4544.1,5476.1 4562.6,5494.6 4562.6,5496.4 4559.9,5499.1 4559.9,5511.5 4570.6,5522.2 4610.3,5522.2 4696.5,5608.4 4696.5,5718.3 v1(4692.9,5721.9)
IO_52: J11.4 U1.T14 | length 2060.1
  Top Layer w8.3: v1(3452.8,4265.2) 3492.1,4304.6 3492.1,4571.6 v1(3665.2,4744.7) ; U1.T14@4614.2,5678.6 v1(4629.9,5694.3)
  mSIG w8.3: J11.4@3353.1,4244.7 3432.3,4244.7 v1(3452.8,4265.2)
  mPWR w8.3: v1(3665.2,4744.7) 3687.5,4744.7 4629.9,5687.1 v1(4629.9,5694.3)
IO_53: J11.5 U1.R14 | length 2200.9
  Top Layer w8.3: v1(3452.8,4214) 3507.9,4269.1 3507.9,4536.9 v1(3622,4651) ; v1(4535.4,5564.4) 4574.8,5603.8 4574.8,5631.3 4606.3,5662.8 4629.9,5662.8 U1.R14@4645.7,5678.6
  mSIG w8.3: J11.5@3253.1,4144.7 3302.8,4194.3 3433.1,4194.3 v1(3452.8,4214) ; v1(3622,4651) v1(4535.4,5564.4)
IO_54: J11.6 U1.T15 | length 2075.4
  Top Layer w8.3: v1(3452.8,4162.8) 3520.1,4230.1 3520.1,4526.4 v1(3621,4627.4) ; v1(4555.1,5556.5) 4599.1,5600.4 4599.1,5621.8 4614.2,5636.9 U1.T15@4614.2,5647.1
  mSIG w8.3: J11.6@3353.1,4144.7 3371.3,4162.8 v1(3452.8,4162.8) ; v1(3621,4627.4) 4550.2,5556.5 v1(4555.1,5556.5)
IO_55: J11.7 U1.R16 | length 2446.5
  Top Layer w8.3: v1(3452.8,4111.6) 3543,4201.8 3543,4476.4 v1(3626.9,4560.3) ; v1(4559.1,5469.9) 4559.1,5528.9 U1.R16@4645.7,5615.6
  mSIG w8.3: J11.7@3249.2,4064.8 3280.3,4095.9 3437,4095.9 v1(3452.8,4111.6) ; v1(3626.9,4560.3) 4021.1,4954.5 4405.9,4954.5 4441.6,4990.2 4441.6,5352.4 v1(4559.1,5469.9)
IO_56: J11.8 U1.P15 | length 2435.4
  Top Layer w8.3: v1(3452.8,4064.4) 3555.1,4166.8 3555.1,4467.4 v1(3621.3,4533.6) ; v1(4574.8,5505.3) 4574.8,5511.1 4661.4,5597.7 4661.4,5631.3 U1.P15@4677.2,5647.1
  mSIG w8.3: J11.8@3353.1,4044.7 3433.1,4044.7 v1(3452.8,4064.4) ; v1(3621.3,4533.6) 4030,4942.3 4435.8,4942.3 4476.4,4982.9 4476.4,5365.1 4574.8,5463.5 v1(4574.8,5505.3)
IO_57: J11.9 U1.P16 | length 2568.6
  Top Layer w8.3: v1(3452.8,4013.2) 3570.9,4131.3 3570.9,4462.1 v1(3643,4534.1) ; v1(4600.4,5507.3) 4645.8,5552.7 4645.8,5564.9 4677.2,5596.3 U1.P16@4677.2,5615.6
  mSIG w8.3: J11.9@3249.2,3964.8 3278,3993.5 3433.1,3993.5 v1(3452.8,4013.2) ; v1(3643,4534.1) 4039,4930.2 4440.8,4930.2 4488.5,4977.9 4488.5,5360 4600.4,5471.9 v1(4600.4,5507.3)
IO_58: J11.10 U1.N14 | length 2579
  Top Layer w8.3: v1(3452.8,3962) 3586.6,4095.9 3586.6,4456.6 v1(3620.8,4490.8) ; v1(4627.2,5512) 4658,5542.8 4658,5559.9 4692.9,5594.8 4692.9,5662.8 U1.N14@4708.7,5678.6
  mSIG w8.3: J11.10@3353.1,3944.7 3352,3945.9 3436.6,3945.9 v1(3452.8,3962) ; v1(3620.8,4490.8) 4047.6,4917.6 4445.5,4917.6 4500.7,4972.8 4500.7,5355 4627.2,5481.4 v1(4627.2,5512)
IO_60: J11.12 U1.N16 | length 2610.5
  Top Layer w8.3: v1(3452.8,3863.6) 3602.4,4013.2 3602.4,4451.3 v1(3643.2,4492.1) ; v1(4654.4,5517.9) 4670.1,5533.6 4670.1,5554.8 4708.7,5593.4 U1.N16@4708.7,5615.6
  mSIG w8.3: J11.12@3353.1,3844.7 3433.9,3844.7 v1(3452.8,3863.6) ; v1(3643.2,4492.1) 4056.6,4905.5 4450.5,4905.5 4512.9,4967.8 4512.9,5349.9 4654.4,5491.4 v1(4654.4,5517.9)
IO_65: J4.1 U1.D3 | length 1925.7
  Top Layer w8.3: U1.D3@4992.1,6025 v1(5007.9,6040.8)
  mSIG w8.3: v1(5007.9,6040.8) 5055.1,6087.7 5055.2,6096 5807.9,6848.6 J4.1@6572,6848.6
IO_66: J4.2 U1.C3 | length 2001.1
  Top Layer w8.3: U1.C3@5023.6,6025 v1(5039.4,6040.8)
  mSIG w8.3: v1(5039.4,6040.8) 5070.9,6072.3 5070.9,6092 5775.6,6796.7 6620.1,6796.7 J4.2@6672,6848.6
IO_67: J4.3 U1.B3 | length 1816.6
  Top Layer w8.3: U1.B3@5055.1,6025 v1(5070.9,6040.8)
  mSIG w8.3: v1(5070.9,6040.8) 5778.8,6748.6 J4.3@6572,6748.6
IO_68: J4.4 U1.A3 | length 1885
  Top Layer w8.3: U1.A3@5086.6,6025 v1@5102.4,6040.7
  mSIG w8.3: v1(5102.4,6040.8) 5759.9,6698.2 6621.6,6698.2 J4.4@6672,6748.6
IO_69: J4.5 U1.B4 | length 1788.3
  Top Layer w8.3: U1.B4@5055.1,5993.5 5070.9,6009.3 5098.5,6009.3 v1(5102.3,6013.2)
  mSIG w8.3: v1(5102.3,6013.2) 5737.8,6648.6 J4.5@6572,6648.6
IO_70: J4.6 U1.A4 | length 1856.8
  Top Layer w8.3: U1.A4@5086.6,5993.5 5111.6,5993.5 v1(5122.4,6004.2)
  mSIG w8.3: v1(5122.4,6004.2) 5717.9,6599.8 6623.2,6599.8 J4.6@6672,6648.6
IO_71: J4.7 U1.B5 | length 1759.8
  Top Layer w8.3: U1.B5@5055.1,5962.1 5071.4,5978.4 5122.7,5978.4 v1(5149.6,6005.3)
  mSIG w8.3: v1(5149.6,6005.3) 5660.3,6516 6539.4,6516 J4.7@6572,6548.6
IO_72: J4.8 U1.A5 | length 1828.3
  Top Layer w8.3: U1.A5@5086.7,5962 5148.8,5962 v1(5189,6002.3)
  mSIG w8.3: v1(5189,6002.3) 5189.7,6002.3 5684.9,6497.5 6620.9,6497.5 J4.8@6672,6548.6
IO_73: J4.9 U1.B6 | length 1742
  Top Layer w8.3: U1.B6@5055.1,5930.5 5066.9,5946.3 5173.2,5946.3 v1(5189,5962)
  mSIG w8.3: v1@5189,5962.1 5189,5977.8 5659.9,6448.6 J4.9@6572,6448.6
IO_74: J4.10 U1.A6 | length 1809.1
  Top Layer w8.3: U1.A6@5086.6,5930.5 5181,5930.5 v1(5212.6,5962)
  mSIG w8.3: v1@5212.6,5962.1 5212.6,5977.8 5633.9,6399 6622.4,6399 J4.10@6672,6448.6
IO_76: J4.12 U1.B7 | length 1812.3
  Top Layer w8.3: U1.B7@5055.1,5899 5070.9,5914.8 5189,5914.8 v1(5236.2,5962)
  mSIG w8.3: v1@5236.2,5962.1 5236.2,5977.8 5559,6300.6 6624,6300.6 J4.12@6672,6348.6
IO_81: J5.1 U1.D6 | length 1662.9
  Top Layer w8.3: v1(4976.4,5914.8) U1.D6@4992.1,5930.5
  mSIG w8.3: v1(4976.4,5914.8) 4979,5914.8 4995.6,5931.4 5255.3,5931.4 5286.3,5962.4 6407.3,5962.4 6458.5,6013.5 6575.5,6013.5 J5.1@6576,6014
IO_82: J5.2 U1.C5 | length 1749.2
  Top Layer w8.3: U1.C5@5023.6,5962 v1(5039.4,5946.3)
  mSIG w8.3: v1(5039.4,5946.3) 5039.4,5954.2 5039.8,5954.6 5175.3,5954.5 5182.8,5947.1 5242.4,5947.1 5269.8,5974.5 6382.6,5974.5 6484.2,6076.2 6613.8,6076.2 J5.2@6676,6014
IO_83: J5.3 U1.D7 | length 1623.3
  Top Layer w8.3: U1.D7@4992.1,5899 4992.1,5895.1 v1(5007.9,5879.4)
  mSIG w8.3: v1(5007.9,5879.4) 5031.1,5902.6 5260.9,5902.6 5290,5931.7 6424,5931.7 6441.7,5914 J5.3@6576,5914
IO_84: J5.4 U1.C6 | length 1729.7
  Top Layer w8.3: v1(5007.9,5914.8) U1.C6@5023.6,5930.5
  mSIG w8.3: v1(5007.9,5914.8) 5012.3,5919.2 5260.3,5919.2 5291.3,5950.2 6412.3,5950.2 6424.2,5962 6628,5962 J5.4@6676,5914
IO_85: J5.5 U1.C7 | length 1597.2
  Top Layer w8.3: U1.C7@5023.6,5899 5023.6,5895.1 v1(5039.4,5879.4)
  mSIG w8.3: v1(5039.4,5879.4) 5239.2,5879.4 5280.3,5838.3 5280.3,5825.9 5289,5817.1 5307.9,5817.1 5311,5814 J5.5@6576,5814
IO_86: J5.6 U1.B8 | length 1669.3
  Top Layer w8.3: U1.B8@5055.1,5867.5 5070.9,5883.3 v1(5267.7,5883.3)
  mSIG w8.3: v1(5267.7,5883.3) 5283.5,5883.3 5306.3,5860.5 5773.3,5860.5 5789.1,5844.7 5801.5,5844.7 5817.2,5860.5 6629.5,5860.5 J5.6@6676,5814
IO_87: J5.7 U1.C9 | length 1612.8
  Top Layer w8.3: U1.C9@5023.6,5836 5027.5,5836 v1(5039.4,5847.9)
  mSIG w8.3: v1(5039.4,5847.9) 5222,5847.9 5355.9,5714 J5.7@6576,5714
IO_88: J5.8 U1.D9 | length 1788.7
  Top Layer w8.3: v1(4976.4,5847.9) 4988.2,5836 U1.D9@4992.1,5836
  mSIG w8.3: v1(4976.4,5847.9) 4992.1,5863.6 5224.4,5863.6 5322.8,5765.2 6624.8,5765.2 J5.8@6676,5714
IO_89: J5.9 U1.B9 | length 1680.1
  Top Layer w8.3: v1(5039.4,5816.4) 5055.1,5832.1 U1.B9@5055.1,5836
  mSIG w8.3: v1(5039.4,5816.4) 5042.9,5819.9 5215.5,5819.9 5458.3,5577 6426,5577 6463,5614 J5.9@6576,5614
IO_90: J5.10 U1.C10 | length 1824.1
  Top Layer w8.3: v1(5007.9,5816.4) 5019.7,5804.5 U1.C10@5023.6,5804.5
  mSIG w8.3: v1(5007.9,5816.4) 5023.6,5832.1 5220.5,5832.1 5436.2,5616.4 6433.9,5616.4 6480.2,5662.8 6627.2,5662.8 J5.10@6676,5614
IO_92: J5.12 U1.D11 | length 1903.2
  Top Layer w8.3: U1.D11@4992.1,5773 4996.1,5773 v1(5007.9,5784.9)
  mSIG w8.3: v1(5007.9,5784.9) 5023.6,5800.6 5216.5,5800.6 5560.1,5456.9 6372.9,5456.9 6480.3,5564.4 6625.6,5564.4 J5.12@6676,5514
IO_97: J6.1 U1.A8 | length 1784.3
  Top Layer w8.3: U1.A8@5086.6,5867.5 5122,5867.5 5824.8,5164.8 v1(6464.3,5164.8)
  mSIG w8.3: v1(6464.3,5164.8) J6.1@6579.9,5164.8
IO_98: J6.2 U1.B10 | length 1882.1
  Top Layer w8.3: U1.B10@5055.1,5804.5 5055.1,5800.7 v1(5070.9,5784.9)
  mSIG w8.3: v1(5070.9,5784.9) 5212.6,5784.9 5755.9,5241.6 6613.8,5241.6 J6.2@6676,5179.4
IO_99: J6.3 U1.A9 | length 1802.7
  Top Layer w8.3: U1.A9@5086.6,5836 5129.9,5836 5842.5,5123.4 6212.6,5123.4 6255.6,5080.5 v1(6460.4,5080.5)
  mSIG w8.3: v1(6460.4,5080.5) 6574.8,5080.5 J6.3@6576,5079.4
IO_100: J6.4 U1.C11 | length 1950.4
  Top Layer w8.3: U1.C11@5023.6,5773 5027.6,5773 v1(5039.4,5784.9)
  mSIG w8.3: v1(5039.4,5784.9) 5051.2,5784.9 5056,5780.1 5056,5778.7 5064.7,5770 5210.3,5770 5750.9,5229.4 5760.2,5229.4 5862.2,5127.4 6627.9,5127.4 J6.4@6676,5079.4
IO_101: J6.5 U1.A10 | length 1837.7
  Top Layer w8.3: U1.A10@5086.6,5804.5 5094.5,5812.4 5130,5812.4 5834.6,5107.7 6204.7,5107.7 6331.9,4980.5 v1(6467.8,4980.5)
  mSIG w8.3: v1(6467.8,4980.5) 6574.8,4980.5 J6.5@6576,4979.4
IO_102: J6.6 U1.B12 | length 1950.1
  Top Layer w8.3: U1.B12@5055.1,5741.5 5066.9,5753.4 v1(5070.9,5753.4)
  mSIG w8.3: v1(5070.9,5753.4) 5075.3,5757.8 5205.3,5757.8 5847.8,5115.2 5862.6,5115.2 5901.6,5076.2 6271.6,5076.2 6315,5032.9 6622.4,5032.9 J6.6@6676,4979.4
IO_103: J6.7 U1.A11 | length 1859.5
  Top Layer w8.3: U1.A11@5086.6,5773 5145.6,5773 5826.7,5091.9 6200.8,5091.9 6413.4,4879.4 v1(6464.6,4879.4)
  mSIG w8.3: v1@6464.6,4879.3 J6.7@6576,4879.3
IO_104: J6.8 U1.B11 | length 2024.7
  Top Layer w8.3: v1(5039.4,5753.4) 5055.1,5769.1 U1.B11@5055.1,5773
  mSIG w8.3: v1(5039.4,5753.4) 5059.1,5733.7 5204.7,5733.7 5897.6,5040.8 6267.7,5040.8 6377.9,4930.5 6624.8,4930.5 J6.8@6676,4879.4
IO_105: J6.9 U1.A12 | length 1908.3
  Top Layer w8.3: U1.A12@5086.6,5741.5 5157.5,5741.5 5822.9,5076.2 6196.9,5076.2 6433.1,4840 6433.1,4808.5 v1(6464.6,4777)
  mSIG w8.3: v1(6464.6,4777) 6573.6,4777 J6.9@6576,4779.4
IO_106: J6.10 U1.B13 | length 2013
  Top Layer w8.3: U1.B13@5055.1,5710.1 5059,5710.1 v1(5066.9,5718)
  mSIG w8.3: v1(5066.9,5718) 5074.8,5710.1 5208.7,5710.1 5929.1,4989.6 6299.2,4989.6 6460.6,4828.2 6627.2,4828.2 J6.10@6676,4779.4
IO_108: J6.12 U1.C12 | length 2147.6
  Top Layer w8.3: U1.C12@5023.6,5741.5 5023.6,5737.6 v1(5039.4,5721.9)
  mSIG w8.3: v1(5039.4,5721.9) 5067,5694.3 5204.7,5694.3 5925.1,4973.9 6291.3,4973.9 6303.1,4962 6303.1,4871.5 6444.9,4729.7 6625.6,4729.7 J6.12@6676,4679.4
IO_113: J7.1 U1.C14 | length 2167.3
  Top Layer w8.3: v1(5007.9,5662.8) U1.C14@5023.6,5678.5
  mSIG w8.3: v1(5007.9,5662.8) 5007.9,5658.8 5000,5651 5000,5640.6 5083.7,5556.8 5166.5,5556.8 5926.3,4797 6135.3,4797 6473.1,4459.2 6473.1,4447.5 J7.1@6576,4344.7
IO_114: J7.2 U1.D14 | length 2363.4
  Top Layer w8.3: v1(4976.4,5662.8) U1.D14@4992.1,5678.5
  mSIG w8.3: v1(4976.4,5662.8) 4976.4,5647 5078.7,5544.7 5161.4,5544.7 5921.3,4784.9 6127.4,4784.9 6461,4451.3 6461,4379 6532.5,4307.5 6532.5,4305.9 6545.7,4292.7 6624,4292.7 J7.2@6676,4344.7
IO_115: J7.3 U1.E14 | length 2338.3
  Top Layer w8.3: U1.E14@4960.6,5678.6 4972.5,5690.4 v1(4976.4,5690.4)
  mSIG w8.3: v1(4976.4,5690.4) 4960.6,5674.6 4960.6,5639.2 5070.9,5529 5153.5,5529 5913.4,4769.1 6126,4769.1 6448.8,4446.3 6448.8,4332.1 6536.2,4244.7 J7.3@6576,4244.7
IO_116: J7.4 U35.18 | length 1044.7
  Top Layer w8.3: U35.18@6239,4903.9 6274.6,4903.9 6437,4741.6 6437,4241.6 v1(6464.6,4214)
  mSIG w8.3: v1(6464.6,4214) 6484.2,4194.3 6625.6,4194.3 J7.4@6676,4244.7
IO_117: J7.5 U35.17 | length 947.6
  Top Layer w8.3: U35.17@6239,4878.3 6276.6,4878.3 6421.3,4733.7 6421.3,4210.1 v1(6464.6,4166.8)
  mSIG w8.3: v1(6464.6,4166.8) 6486.6,4144.7 J7.5@6576,4144.7
IO_118: J7.6 U35.16 | length 1092.5
  Top Layer w8.3: U35.16@6239,4852.8 6278.6,4852.8 6401.6,4729.8 6401.6,4182.5 v1(6464.6,4115.6)
  mSIG w8.3: v1(6464.6,4115.6) 6484.2,4095.9 6627.2,4095.9 J7.6@6676,4144.7
IO_119: J7.7 U35.15 | length 1000.1
  Top Layer w8.3: U35.15@6239,4827.1 6280.6,4827.1 6381.9,4725.8 6381.9,4147.1 v1(6464.6,4064.4)
  mSIG w8.3: v1(6464.6,4064.4) 6484.2,4044.7 J7.7@6576,4044.7
IO_120: J7.8 U35.14 | length 1150.4
  Top Layer w8.3: U35.14@6239,4801.6 6282.5,4801.6 6366.1,4718 6366.1,4107.7 v1(6464.6,4009.3)
  mSIG w8.3: v1(6464.6,4009.3) 6480.3,3993.5 6624.8,3993.5 J7.8@6676,4044.7
IO_121: J7.9 U35.13 | length 1050.4
  Top Layer w8.3: U35.13@6239,4776 6280.6,4776 6346.4,4710.1 6346.4,4080.1 v1(6464.6,3962)
  mSIG w8.3: v1(6464.6,3962) 6481.9,3944.7 J7.9@6576,3944.7
IO_122: J7.10 U35.12 | length 1178.1
  Top Layer w8.3: U35.12@6239,4750.4 6278.6,4750.4 6326.8,4702.2 6326.8,4068.3 v1(6464.6,3930.5)
  mSIG w8.3: v1(6464.6,3930.5) 6493.8,3901.2 6632.5,3901.2 J7.10@6676,3944.7
IO_124: J7.12 U35.11 | length 1175.1
  Top Layer w8.3: U35.11@6239,4724.8 6276.6,4724.8 6307.1,4694.3 6307.1,4056.5 v1@6460.6,3902.9
  mSIG w8.3: v1(6460.7,3902.9) 6475.4,3888.2 6632.5,3888.2 J7.12@6676,3844.7
JTAG_TCK: R21.2 U1.T10 U37.13 | length 652.1
  Top Layer w8.3: U37.13@4462.6,5347 U37.13@4462.7,5347.1 ; R21.2@4574.8,5346 4553.3,5367.5 4483.2,5367.5 U37.13@4462.7,5347.1 ; U1.T10@4614.2,5804.5 4610.2,5804.5 4547.6,5741.9 4547.6,5708.5 4462.7,5623.7 v1(4462.7,5576.9) U37.13@4462.7,5347.1
JTAG_TDI: U1.R11 U37.14 | length 516.1
  Top Layer w8.3: U37.14@4442.9,5347 4444.3,5348.4 v1(4444.3,5557.1) ; v1(4629.9,5757.3) U1.R11@4645.7,5773
  mPWR w8.3: v1(4444.3,5557.1) 4444.3,5582.1 4619.6,5757.3 v1(4629.9,5757.3)
JTAG_TDO: U1.M10 U37.15 | length 702
  Top Layer w8.3: U37.15@4423.2,5347 4424.6,5348.4 v1(4424.6,5537.4) ; v1(4724.4,5788.8) U1.M10@4740.2,5804.5
  Bottom Layer w8.3: v1(4424.6,5537.4) 4424.6,5559.9 4469.3,5604.6 4469.3,5606 4478.1,5614.8 4479.5,5614.8 4496.1,5631.3 4582.7,5631.3 4601.5,5612.5 4642.5,5612.5 4708.7,5678.6 4708.7,5773 v1(4724.4,5788.8)
JTAG_TMS: U1.T11 U37.16 | length 513.7
  Top Layer w8.3: v1(4403,5515.7) 4403.5,5515.2 U37.16@4403.5,5347 ; v1(4594.5,5753.4) U1.T11@4614.2,5773
  mPWR w8.3: v1(4403,5515.7) 4403,5561.9 v1(4594.5,5753.4)
L3_1: 
LED_PIN: R99.2 U1.L1 | length 103.5
  Top Layer w8.3: R99.2@4750.1,6182.5 4771.7,6161 U1.L1@4771.7,6088
P1.1V: C4.2 C10.2 C62.2 L1.2 R1.2 U1.G6 | length 1337.6
  Top Layer w8.3: U1.G6@4897.6,5930.5 4909.5,5942.3 v1(4913.4,5942.3)
  Top Layer w11.8: C10.2@4220.5,6382.3 4225.1,6382.3 4232.3,6389.4 v2(4232.3,6430.5) 4232.3,6458.1 4250.5,6476.3 R1.2@4265.7,6476.3
  Top Layer w23.6: L1.2@4479.6,6216.5 4518.2,6216.5 v2(4555.1,6253.4) 4586.6,6284.9 C4.2@4586.6,6316.4 ; C62.2@4500,6316.4 C4.2@4586.6,6316.4 ; C4.2@4596.3,6316.4 C4.2@4586.6,6316.4
  mPWR w8.3: v2(4555.1,6253.4) 4555.1,6241.6 4740.2,6056.5 4740.2,5993.5 4771.6,5962 4897.6,5962 4913.4,5946.3 v1(4913.4,5942.3)
  mPWR w23.6: v2(4232.3,6430.5) 4377.9,6430.5 v2(4555.1,6253.4)